# Altium PCB DE-160724.PcbDoc
Units mil, origin at the board's own origin, x right, y up, seen from the top; angles counter-clockwise.
Board outline 3346.46 x 2952.76 mil, 2 copper layers (Top Layer, Bottom Layer); 101 components, 67 nets, 255 pads, 38 vias.
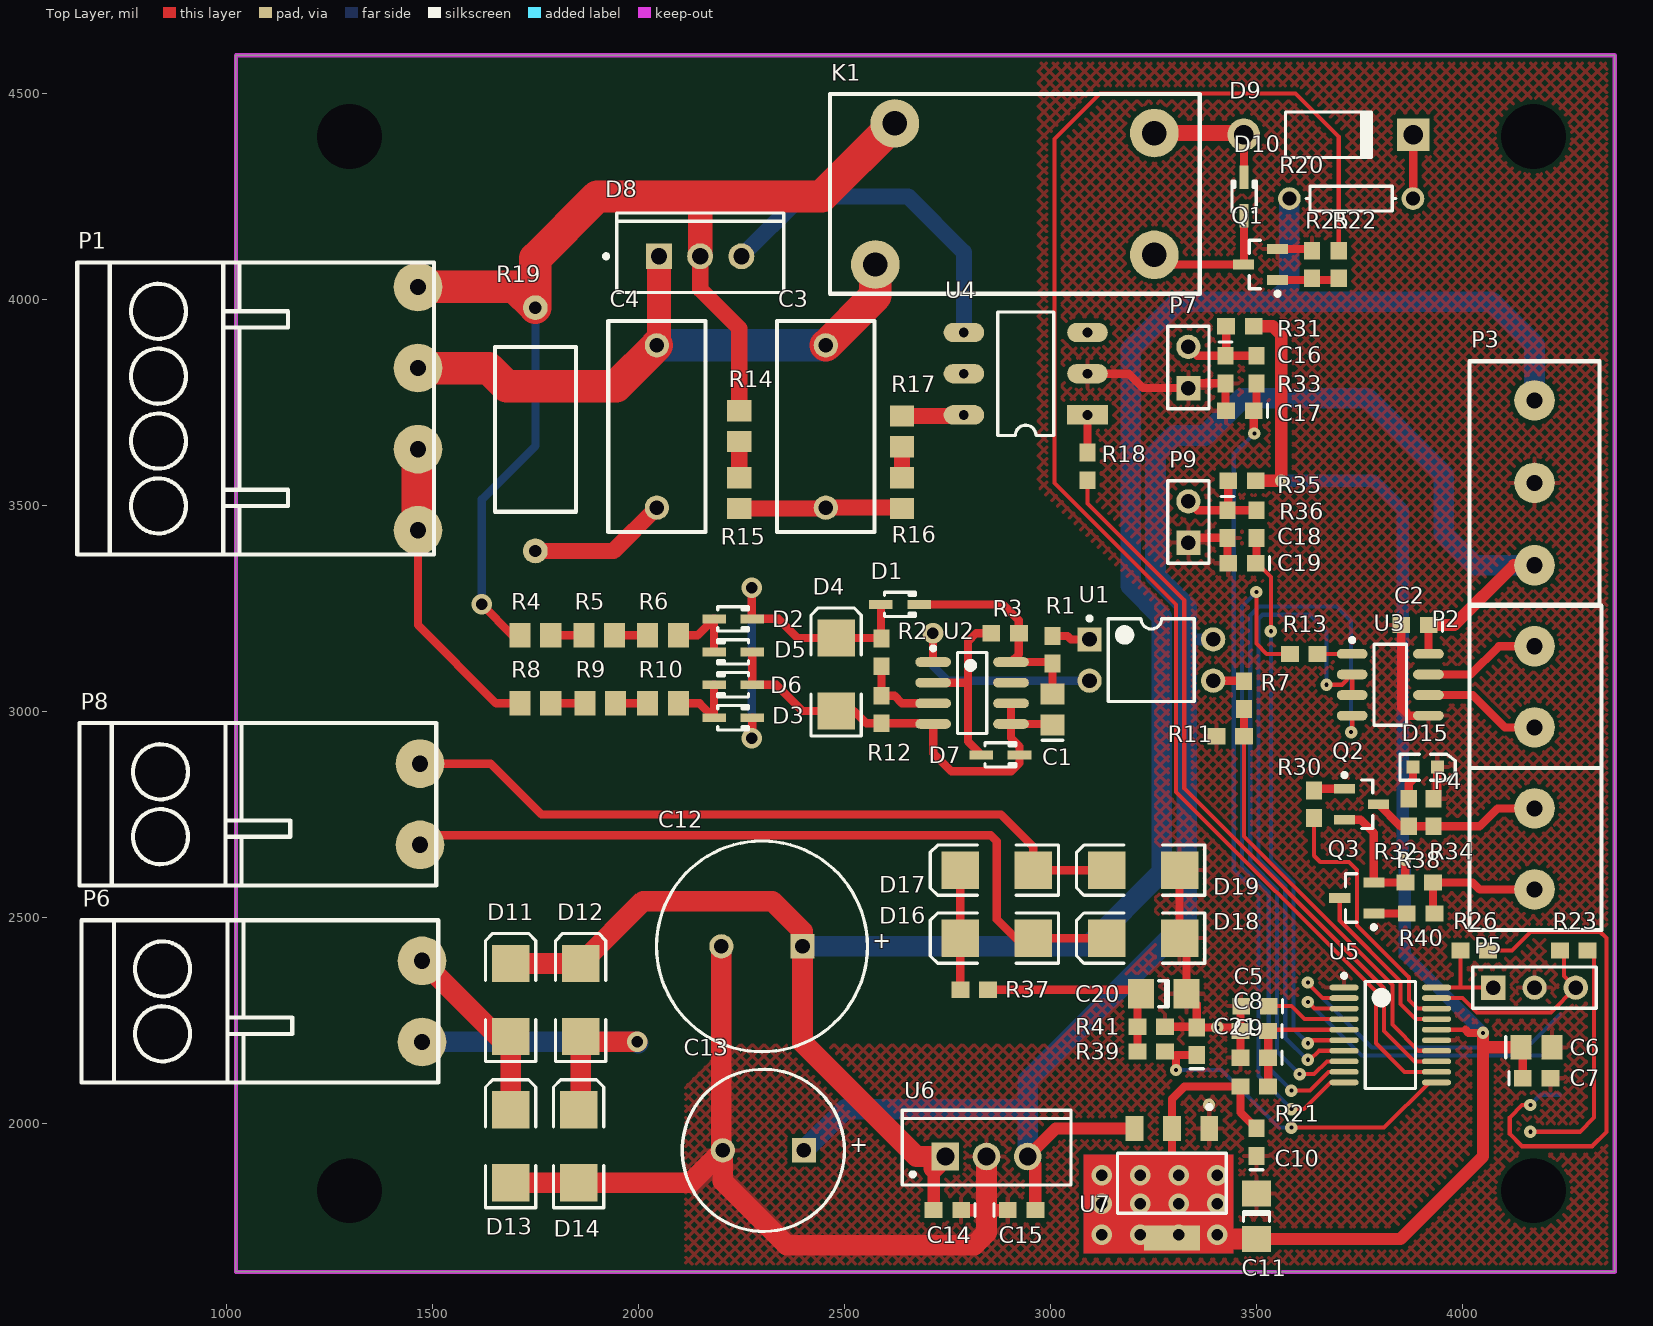
[diagram p0: Top Layer view]
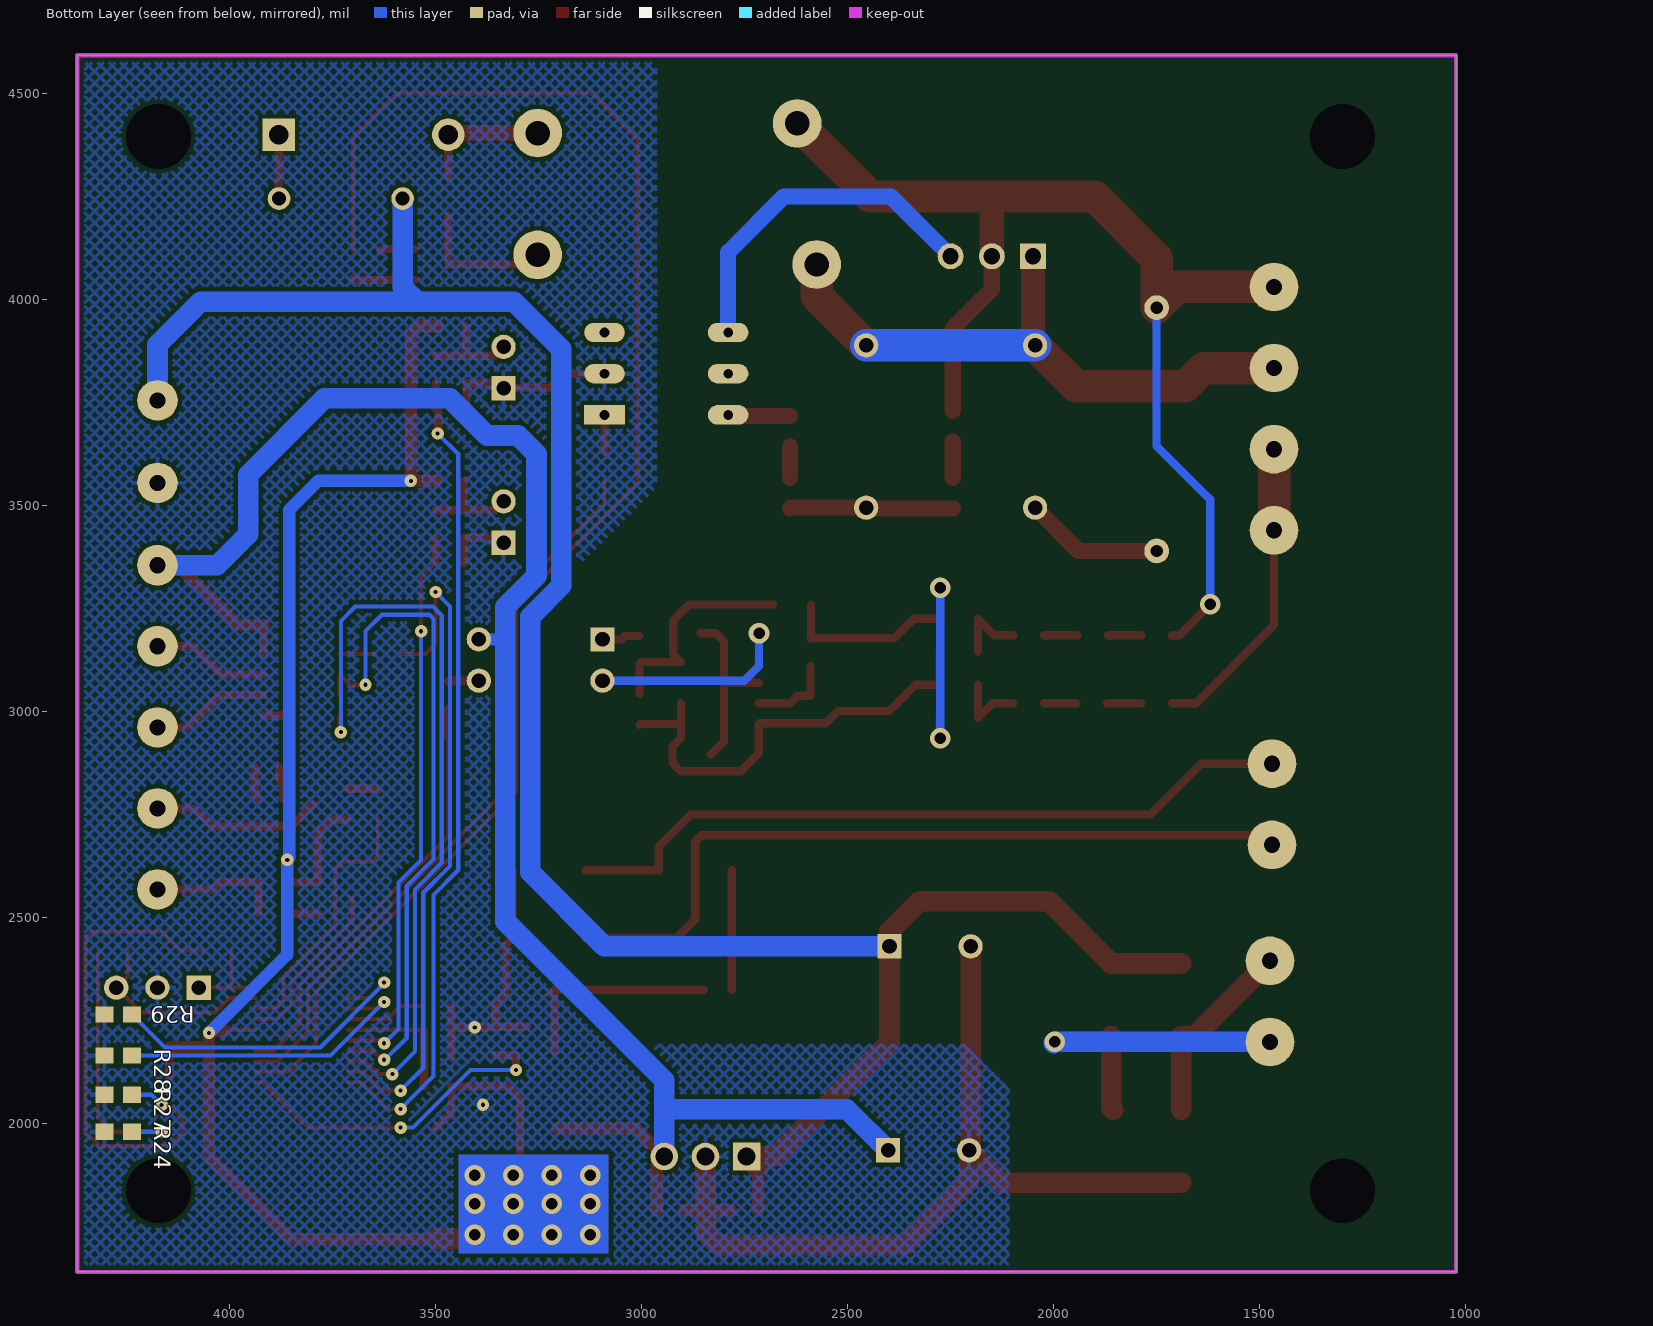
[diagram p1: Bottom Layer view, seen from below]

## Layer stack, top to bottom
Top Solder: solder mask 0.4, Solder Resist, Dk 3.5
Top Layer: signal copper 1.4
Dielectric 1: dielectric 12.6, FR-4, Dk 4.8
Bottom Layer: signal copper 1.4
Bottom Solder: solder mask 0.4, Solder Resist, Dk 3.5

## Board outline
1023.15,1640 1023.15,4592.76 4369.61,4592.76 4369.61,1640

## Design rules (kind name [scope] priority, off if disabled: settings)
Clearance [All] p1: gap=10 ignorepadtopadclearanceinfootprint=FALSE except(0: Arc-Hole Track-Hole SMDPad-Hole THPad-Hole Via-Hole Fill-Hole Poly-Hole Region-Hole Text-Hole)
PolygonConnect [All] p1: connectstyle=Relief reliefconductorwidth=10 reliefentries=4 polygonreliefangle="90 Angle" airgapwidth=10
RoutingVias [All] p1: holewidth=28 width=50 viastyle="Through Hole" minholewidth=28 minwidth=50 maxholewidth=28 maxwidth=50
SolderMaskExpansion [All] p1: expansion=4
Width [All] p1: maxlimit=100 minlimit=10 preferedwidth=20
30 further rules are at their usual default settings.

## Components (designator, comment, footprint, x,y, rotation, side; value= is the part's Value field where it differs from the comment)
C1 "10uF" 0805 3005,3005 r90 top
C2 "100nF" 0603 3885,3210 r180 top
C3 "47nF" "X2 CAP" 2455,3691.85 r270 top
C4 "47nF" "X2 CAP" 2045,3691.85 r270 top
C5 "100nF" 0603 3496.54,2285 r180 top
C6 "4u7" 0805 4180,2185 r0 top
C7 "100nF" 0603 4180,2110 r0 top
C8 "1uF" 0603 3495,2225 r180 top
C9 "10nF" 0603 3495,2160 r180 top
C10 "100nF" 0603 3500,1955 r90 top
C11 "C1206" 1206 3500,1775 r270 top value=47uF
C12 "4700uF" CAPPR5-13X25 2300,2430 r180 top
C13 "470uF" CAPPR5-10X16 2303.43,1935 r180 top
C14 "100nF" 0603 2750,1790 r180 top
C15 "100nF" 0603 2930,1790 r0 top
C16 "1uF" 0603 3425,3830 r270 top
C17 "1uF" 0603 3460,3730 r180 top
C18 "1uF" 0603 3430,3455 r270 top
C19 "1uF" 0603 3465,3360 r180 top
C20 "C1206" 1206 3275,2315 r180 top value=47uF
C21 "1uF" 0603 3355,2200 r90 top
D1 "1N4148" SOD323 2635,3260 r0 top
D2 "1N4148" SOD323 2230,3225 r0 top
D3 "1N4148" SOD323 2230,2985 r0 top
D4 "ZD12V" SMB 2480,3090 r90 top
D5 "1N4148" SOD323 2230,3145 r180 top
D6 "1N4148" SOD323 2230,3065 r180 top
D7 "1N4148" SOD323 2878.74,2895 r0 top
D8 "BTA16-600" ONSC-TO-220-3-221A-07 2150,4105 r90 top
D9 "ZD8V2" DO-41 3675,4400 r0 top
D10 "1N4148" SOD323 3470,4250 r90 top
D11 "S3GB" SMB 1690,2300 r90 top
D12 "S3GB" SMB 1860,2300 r90 top
D13 "S3GB" SMB 1690,1945 r90 top
D14 "S3GB" SMB 1855,1945 r90 top
D15 "STATUS_LED" 1.6X0.8X0.8 3909.53,2865 r0 top
D16 "1N4001" SMB 2870,2450 r180 top
D17 "1N4001" SMB 2870,2615 r180 top
D18 "1N4001" SMB 3225,2450 r180 top
D19 "1N4001" SMB 3225,2615 r180 top
K1 "HF25F" HF25F 2913.58,4256.26 r180 top
P1 "KONEKTOR 4 PINA" "KONEKTOR 4 PINA" 1465,3735.28 r0 top
P2 "RS485" "TERMINAL BLOK 2" 4175,3060 r0 top
P3 "POWER" "TERMINAL BLOK 3" 4175,3555 r180 top
P4 "CTRL" "TERMINAL BLOK 2" 4175,2666.57 r0 top
P5 "ICSP" HDR1X3 4075,2330 r0 top
P6 "PWR_TRAFO" "KONEKTOR 2 PINA" 1475,2296.57 r0 top
P7 "NTC10K" HDR1X2 3335,3785 r90 top
P8 "HEAT_TRAFO" "KONEKTOR 2 PINA" 1470,2775 r0 top
P9 "NTC10K" HDR1X2 3335,3410 r90 top
Q1 "MMBT2222A" SOT23_N 3510,4085 r180 top
Q2 "BC807" SOT23_N 3755,2775 r0 top
Q3 "BC807" SOT23_N 3743.66,2547.4 r180 top
R1 "1K" ERA-0603 3005,3150 r270 top
R2 "3K9" ERA-0603 2590,3143.46 r90 top
R3 "39K" ERA-0603 2890,3190 r0 top
R4 "18K" ERA-0805 1750,3185 r0 top
R5 "18K" ERA-0805 1905,3185 r0 top
R6 "18K" ERA-0805 2060,3185 r0 top
R7 "1K2" ERA-0603 3470,3040 r90 top
R8 "18K" ERA-0805 1750,3020 r0 top
R9 "18K" ERA-0805 1907.4,3020 r0 top
R10 "18K" ERA-0805 2060,3020 r0 top
R11 "2K2" ERA-0603 3436.54,2940 r0 top
R12 "39K" ERA-0603 2590,3005 r90 top
R13 "1K" ERA-0603 3615,3140 r0 top
R14 "220R" ERA-0805 2245,3692.6 r270 top
R15 "220R" ERA-0805 2245,3530 r270 top
R16 "220R" ERA-0805 2640,3530 r90 top
R17 "220R" ERA-0805 2640,3680 r90 top
R18 "180R" ERA-0603 3090,3595 r90 top
R19 "100R" 1W100R 1750,3685 r90 top
R20 "Res1" AXIAL-0.3 3730,4245 r180 top value=47R
R21 "10R" ERA-0603 3495,2090 r180 top
R22 "1K" ERA-0603 3700,4085 r270 top
R23 "10K" ERA-0603 4270,2420 r180 top
R24 "NF" ERA-0603 4270,1980 r180 bottom
R25 "100K" ERA-0603 3635,4085 r270 top
R26 "10K" ERA-0603 4028.46,2420 r180 top
R27 "NF" ERA-0603 4270,2070 r180 bottom
R28 "NF" ERA-0603 4270,2165 r180 bottom
R29 "NF" ERA-0603 4270,2265 r180 bottom
R30 "4K7" ERA-0603 3640,2775 r270 top
R31 "10K" ERA-0603 3460,3935 r0 top
R32 "1K" ERA-0603 3870,2755 r90 top
R33 "1K" ERA-0603 3500,3830 r90 top
R34 "4K7" ERA-0603 3930,2755 r90 top
R35 "10K" ERA-0603 3465,3560 r0 top
R36 "1K" ERA-0603 3500,3455 r90 top
R37 "33K" ERA-0603 2815,2325 r180 top
R38 "4K7" ERA-0603 3895,2585 r0 top
R39 "1K" ERA-0603 3245,2175 r180 top
R40 "4K7" ERA-0603 3898.46,2510 r0 top
R41 "3K3" ERA-0603 3245,2235 r180 top
U1 "PC817" DIP-4 3245,3125 r0 top
U2 "LM393MX" M08A_N 2810,3045 r0 top
U3 "MAX485" D008_L 3825,3065 r0 top
U4 "MOC3052" DIP6 3090,3720 r180 top
U5 "STM32F030F4P6" STM-TSSOP20_N 3825,2215 r0 top
U6 "L78M05CV" TO220 2845,1920 r0 top
U7 "REG1117-3.3" ZZ311 3295,1855 r180 top

## Footprints (in the part's own frame and the unit in brackets; to place one, negate y for a bottom-side part, rotate by r counter-clockwise, add the part's x,y. Pads: shape width x height; smd on the part's side, far side on the other; paste and mask are expansions set on the pad)
1.6X0.8X0.8 [mm] "SM LED; 2 Flat Leads"
  rect 0.8x0.8 smd: 1(-0.75,0) 2(0.75,0)
  silkscreen extent -1.55,-0.8 1.85,0.8
1W100R [mil] "1W 100R resistor"
  round 60 hole 30: 1(-295.28,0) 2(295.28,0)
  silkscreen extent -200,-98 200,98
0603 [mm] "Chip Capacitor; Body 1.6 x 0.8 mm (LxW typ)"
  rect 1.1x1 smd: 1(-0.85,0) 2(0.85,0)
  silkscreen extent -1.7,-0.4 -1.7,0.4
0805 [mm] "Chip Capacitor; Body 2.0 x 1.2 mm (LxW typ)"
  rect 1.3x1.5 smd: 1(-0.95,0) 2(0.95,0)
  silkscreen extent -1.9,-0.65 -1.9,0.65
1206 [mm] "Chip Capacitor; Body 3.2 x 1.6 mm (LxW typ)"
  rect 1.6x1.8 smd: 1(-1.4,0) 2(1.4,0)
  silkscreen extent -0.3,-0.8 0.3,0.8
AXIAL-0.3 [mm] "Axial Device, Thru-Hole; 2 Leads; 0.3 in Pin Spacing"
  round 1.4 hole 0.85: 1(-3.81,0) 2(3.81,0)
  silkscreen extent -2.77,-0.76 2.77,0.76
CAPPR5-10X16 [mm] "Capacitor, Electrolytic, Radial; Body 10 x 16 mm (Dia.xH typ); Pin Spacing 5 mm (typ)"
  rect 1.5x1.5 hole 0.9: 1(-2.5,0)
  round 1.5 hole 0.9: 2(2.5,0)
  silkscreen extent -5,-5 5,5
CAPPR5-13X25 [mm] "Capacitor, Electrolytic, Radial; Body 13 x 25 mm (Dia.xH typ); Pin Spacing 5 mm (typ)"
  rect 1.5x1.5 hole 0.9: 1(-2.5,0)
  round 1.5 hole 0.9: 2(2.5,0)
  silkscreen extent -6.5,-6.5 6.5,6.5
D008_L [mm] "SOIC, 8-Leads, Body 4.9x3.9mm, Pitch 1.27mm, IPC High Density"
  oval 1.9x0.6 smd: 1(-2.35,1.905) 2(-2.35,0.635) 3(-2.35,-0.635) 4(-2.35,-1.905) 5(2.35,-1.905) 6(2.35,-0.635) 7(2.35,0.635) 8(2.35,1.905)
  silkscreen extent -2.47,-2.5 1,2.88, body extent -2,-2.5 2,2.5, height 1.75
DIP6 [mm]
  rect 2.5x1.2 hole 0.6: 1(0,0)
  oval 2.5x1.2 hole 0.6: 2(0,-2.54) 3(0,-5.08) 4(7.62,-5.08) 5(7.62,-2.54) 6(7.62,0)
  silkscreen extent 2.08,-6.35 5.54,1.27, body extent 0.63,-6.48 6.99,1.27, height 1
DIP-4 [mm] "DIP; 4 Leads; Row Spacing 7.62 mm; Pitch 2.54 mm"
  rect 1.5x1.5 hole 0.9: 1(-3.81,1.27)
  round 1.5 hole 0.9: 2(-3.81,-1.27) 3(3.81,-1.27) 4(3.81,1.27)
  silkscreen extent -3.93,-2.55 2.65,2.69, body extent -3.15,-2.5 3.15,2.5, height 5.6
DO-41 [mm] "Diode, Axial; Body 5.2 x 2.7 mm (LxDia. max), Lead Dia. 0.86 mm (max)"
  round 2 hole 1.2: 1(-5.23,0)
  rect 2x2 hole 1.2: 2(5.23,0)
  silkscreen extent -2.65,-1.4 2.75,1.4
ERA-0603 [mm] "Chip Resistor; Body 1.6 x 0.8 mm (LxW typ)"
  rect 1.1x1 smd: 1(-0.85,0) 2(0.85,0)
ERA-0805 [mm] "Chip Resistor; Body 2 x 1.3 mm (LxW typ)"
  rect 1.3x1.5 smd: 1(-0.95,0) 2(0.95,0)
HDR1X2 [mm] "Connector; Header; 2 Position"
  rect 1.5x1.5 hole 0.9: 1(0,0)
  round 1.5 hole 0.9: 2(2.54,0)
  silkscreen extent -1.27,-1.27 3.81,1.27
HDR1X3 [mm] "Connector; Header; 3 Position"
  rect 1.5x1.5 hole 0.9: 1(0,0)
  round 1.5 hole 0.9: 2(2.54,0) 3(5.08,0)
  silkscreen extent -1.27,-1.27 6.35,1.27
HF25F [mm] "PCB relay 20A/250VAC 16A/30VDC"
  round 3 hole 1.5: 1(-8.6,3.75) 2(-8.6,-3.75) 3(8.6,4.35) 4(7.4,-4.35)
  silkscreen extent -11.4,-6.15 11.4,6.15, body extent -11.43,-6.1 11.43,6.1, height 25
"KONEKTOR 2 PINA" [mm] "Razdvojivi konektor 2 pina"
  round 3 hole 1: 1(0,2.5) 2(0,-2.5)
  silkscreen extent -21,-5 1,5, body extent -20.95,-5.08 1.02,5.08, height 10
"KONEKTOR 4 PINA" [mm] "Razdvojivi konektor 4 pina"
  round 3 hole 1: 1(0,7.5) 2(0,2.5) 3(0,-2.5) 4(0,-7.5)
  silkscreen extent -21,-9 1,9, body extent -20.95,-9.02 1.02,9.14, height 10
M08A_N [mm] "SOIC, 8-Leads, Body 4.9x3.9mm, Pitch 1.27mm, IPC Medium Density"
  oval 2.2x0.6 smd: 1(-2.4,1.905) 2(-2.4,0.635) 3(-2.4,-0.635) 4(-2.4,-1.905) 5(2.4,-1.905) 6(2.4,-0.635) 7(2.4,0.635) 8(2.4,1.905)
  silkscreen extent -2.52,-2.5 0.9,2.88, body extent -2,-2.5 2,2.5, height 1.75
ONSC-TO-220-3-221A-07 [mm] "FM, 3-Leads, Body 10.3x4.85mm, Pitch 2.54mm"
  rect 1.6x1.6 hole 1: 1(0,2.54)
  round 1.6 hole 1: 2(0,0) 3(0,-2.54)
  silkscreen extent -2.23,-5.15 2.67,5.92, body extent -2.21,-5.15 2.64,5.15, height 19.68
SMB [mm] "DO-214-AA/SMB; 2 C-Bend Leads; Body 5.3 x 3.6 mm, inc. leads (LxW)"
  rect 2.3x2.3 smd: 1(-2.25,0) 2(2.25,0)
  silkscreen extent -3.8,-1.55 4.1,1.55
SOD323 [mm] "SOD-323/SC-76; 2 Leads; Body 1.7 x 1.3 mm, (LxW)"
  rect 1.45x0.55 smd: 1(1.175,0) 2(-1.175,0)
  silkscreen extent -0.95,-0.75 0.95,0.75
SOT23_N [mm] "SOT23, 3-Leads, Body 2.9x1.3mm, Pitch 0.95mm, Lead Span 2.3mm, IPC Medium Density"
  rect 1.3x0.6 smd: 1(-1.05,0.95) 2(-1.05,-0.95) 3(1.05,0)
  silkscreen extent -1.18,-1.5 0.7,1.92, body extent -0.7,-1.5 0.7,1.5, height 1.1
STM-TSSOP20_N [mm] "SOP, 20-Leads, Body 6.6x4.5mm, Pitch 0.65mm, IPC Medium Density"
  oval 1.8x0.35 smd: 1(-2.85,2.925) 2(-2.85,2.275) 3(-2.85,1.625) 4(-2.85,0.975) 5(-2.85,0.325) 6(-2.85,-0.325) 7(-2.85,-0.975) 8(-2.85,-1.625) 9(-2.85,-2.275) 10(-2.85,-2.925) 11(2.85,-2.925) 12(2.85,-2.275) 13(2.85,-1.625) 14(2.85,-0.975) 15(2.85,-0.325) 16(2.85,0.325) 17(2.85,0.975) 18(2.85,1.625) 19(2.85,2.275) 20(2.85,2.925)
  silkscreen extent -2.97,-3.3 1.55,3.77, body extent -2.25,-3.3 2.25,3.3, height 1.2
"TERMINAL BLOK 2" [mm] "Terminal blok 3,5mm"
  round 2.5 hole 1: 1(0,-2.5) 2(0,2.5)
  silkscreen extent -4,-5 4.13,5
"TERMINAL BLOK 3" [mm] "Terminal blok konektor 3 pina"
  round 2.5 hole 1: 1(0,5.08) 2(0,0) 3(0,-5.08)
  silkscreen extent -4,-7.5 4,7.5
TO220 [mm] "TO, Thru-Hole, Vertical, Heatsink Mounted; 3 In-Line Leads; Pitch 2.54 mm"
  rect 1.7x1.7 hole 1.1: 1(-2.54,0)
  round 1.7 hole 1.1: 2(0,0) 3(2.54,0)
  silkscreen extent -5.2,-1.75 5.2,2.85, body extent -5.25,-1.8 5.25,2.9, height 19.7
"X2 CAP" [mm] "X2 275VAC CAPACITOR"
  round 1.5 hole 0.9: 1(-5,0) 2(5,0)
  silkscreen extent -6.5,-3 6.5,3, body extent -6.35,-3.05 6.35,3.05, height 10
ZZ311 [mm] "SOT-223/SC-73; 4 Leads; Body 6.7 x 7.3 mm, inc. leads (LxW max)"
  rect 1.1x1.55 smd: 1(-2.3,-3.375) 2(0,-3.375) 3(2.3,-3.375)
  rect 3.45x1.55 smd: 4(0,3.375)
  silkscreen extent -3.35,-4.82 3.35,1.85

## Part data
C1 C6: library part C0805, "Ceramic Chip Capacitor - Standard", PackageDocument=Mar-2001, Code_IPC=2012[0805], Code_JEITA=0805, ComponentLink1Description="Manufacturer Link", ComponentLink1URL=http://www.kemet.com/, ComponentLink2Description=Datasheet, ComponentLink2URL=http://www.kemet.com/kemet/web/homepage/kechome.nsf/vapubfilesname/F3102TA.pdf/$file/F3102TA.pdf, DatasheetDocument=Mar-2001, LatestRevisionDate=19-Mar-2004, LatestRevisionNote="Silkscreen size reduced.", Note="Footprint corresponds to dimensions for bulk cassette packaging. This case size has tightened tolerances.", PackageReference=0805, Published=17-Jul-2002, Publisher="Altium Limited"
C2 C5 C7 C8 C9 C10 C14 C15 C16 C17 C18 C19 C21: library part C0603, "Ceramic Chip Capacitor - Standard", PackageDocument=Mar-2001, Code_IPC="1608 [0603]", Code_JEITA=0603, ComponentLink1Description="Manufacturer Link", ComponentLink1URL=http://www.kemet.com/, ComponentLink2Description=Datasheet, ComponentLink2URL=http://www.kemet.com/kemet/web/homepage/kechome.nsf/vapubfilesname/F3102TA.pdf/$file/F3102TA.pdf, DatasheetDocument=Mar-2001, LatestRevisionDate=19-Mar-2004, LatestRevisionNote="Silkscreen size reduced.", Note="Footprint corresponds to dimensions for bulk cassette packaging. This case size has tightened tolerances.", PackageReference=0603, Published=17-Jul-2002, Publisher="Altium Limited"
C3 C4: library part "CAP X2", "X2 275VAC capaitor"
C11 C20: "Ceramic Chip Capacitor - Standard", PackageDocument=Mar-2001, Code_IPC="3216 [1206]", Code_JEITA=1206, ComponentLink1Description="Manufacturer Link", ComponentLink1URL=http://www.kemet.com/, ComponentLink2Description=Datasheet, ComponentLink2URL=http://www.kemet.com/kemet/web/homepage/kechome.nsf/vapubfilesname/F3102TA.pdf/$file/F3102TA.pdf, DatasheetDocument=Mar-2001, LatestRevisionDate=19-Mar-2004, LatestRevisionNote="Silkscreen size reduced.", PackageReference=1206, Published=17-Jul-2002, Publisher="Altium Limited"
C12: library part EKA00GG447C00, "Aluminum Electrolytic Capacitor, Radial Style with Long Leads: 4700uF, 10V", ComponentLink1Description="Manufacturer Link", ComponentLink1URL=http://www.vishay.com/, ComponentLink2Description=Datasheet, ComponentLink2URL=http://www.vishay.com/docs/25014/eka.pdf, DatasheetDocument=20-Feb-2001, DrillSize="Nominal, Rounded To The Nearest 0.1mm", Note="Refer to Manufacturer's Data Sheets for other lead formations", PackageReference=CAPPR5-13X25, Published=19-Mar-2004, Publisher="Altium Limited"
C13: library part EKA00DD347F00, "Aluminum Electrolytic Capacitor, Radial Style with Long Leads: 470uF, 35V", ComponentLink1Description="Manufacturer Link", ComponentLink1URL=http://www.vishay.com/, ComponentLink2Description=Datasheet, ComponentLink2URL=http://www.vishay.com/docs/25014/eka.pdf, DatasheetDocument=20-Feb-2001, DrillSize="Nominal, Rounded To The Nearest 0.1mm", Note="Refer to Manufacturer's Data Sheets for other lead formations", PackageReference=CAPPR5-10X16, Published=19-Mar-2004, Publisher="Altium Limited"
D1 D2 D3 D5 D6 D7 D10: library part 1PS76SB10, "Schottky Barrier Diode", ComponentLink1Description="Manufacturer Link", ComponentLink1URL=http://www.semiconductors.philips.com/, ComponentLink2Description=Datasheet, ComponentLink2URL=http://www.semiconductors.philips.com/acrobat/datasheets/1PS76SB10_2.pdf, DatasheetVersion=14-Oct-1996, LatestRevisionDate=19-Mar-2004, LatestRevisionNote="Silkscreen size reduced.", PackageDescription="SOD-323/SC-76; 2 Leads; Body 1.7 x 1.3 mm, (LxW)", PackageReference=SOD323, PackageVersion=May-1999, Published=17-Sep-2003, Publisher="Altium Limited"
D4: library part 10BQ100, "Schottky Rectifier", ComponentLink1Description="Manufacturer Link", ComponentLink1URL=http://www.irf.com/, ComponentLink2Description=Datasheet, ComponentLink2URL=http://www.irf.com/product-info/datasheets/data/10bq100.pdf, DatasheetVersion=PD-2.437A, LatestRevisionDate=17-Jul-2002, LatestRevisionNote="Re-released for DXP Platform.", PackageDescription="DO-214-AA/SMB; 2 C-Bend Leads; Body 5.3 x 3.6 mm, inc. leads (LxW)", PackageReference=SMB, Published=8-Jun-2000, Publisher="Altium Limited"
D8: library part BTA08-600BW3G, "Triacs, Silicon Bidirectional Thyristor, 3-Pin TO-220, Pb-Free, Tube", Manufacturer="On Semiconductor", Supplier Part Number 1=BTA08-600BW3G-ND, ComponentLink1Description="Manufacturer URL", ComponentLink1URL=http://www.onsemi.com/, ComponentLink2Description=Datasheet, ComponentLink2URL=http://www.onsemi.com/pub_link/Collateral/BTA08-600BW3-D.PDF, ComponentLink3Description="Package Specification", ComponentLink3URL=http://www.onsemi.com/pub_link/Collateral/221A-07.PDF, DatasheetVersion="Rev. 1", IGT Max (mA)=50, IT(RMS) Max (A)=8, ITSM Max (A)=90, Mounting Technology="Through Hole", PackageDescription="3-Pin Flange Mount, Vertical Straight Lead, Body 9.97 x 4.445 mm, Pitch 2.54 mm", PackageReference=TO-220-3-221A-07, PackageVersion="Rev. O, 07/2008", Packing=Tube, PartNumber=BTA08-600BW3G, RoHS=Pb-Free, Supplier 1=Digi-Key, Supplier 2=Newark, Supplier 3=Mouser, Supplier Part Number 2=13P2072, Supplier Part Number 3=863-BTA08-600BW3G
D9: library part 1N4003, "1.0 Ampere General Purpose Rectifier", PackageDocument=Aug-1999, Code_JEDEC=DO-204-AL, ComponentLink1Description="Manufacturer Link", ComponentLink1URL=http://www.fairchildsemi.com/, ComponentLink2Description="Pinout Specification", ComponentLink2URL=http://www.fairchildsemi.com/ds/1N%2F1N4001.pdf, DatasheetDocument=1998, LatestRevisionDate=17-Jul-2002, LatestRevisionNote="Re-released for DXP Platform.", PackageReference=DO-41, Published=8-Jun-2000, Publisher="Altium Limited"
D11 D12 D13 D14 D16 D17 D18 D19: library part "D Schottky", "Schottky Diode", Code_JEDEC=DO-214-AA, LatestRevisionDate=17-Jul-2002, LatestRevisionNote="Re-released for DXP Platform.", PackageDescription="DO-214-AA/SMB; 2 C-Bend Leads; Body 5.3 x 3.6 mm, inc. leads (LxW)", PackageReference=SMB, Published=8-Jun-2000, Publisher="Altium Limited"
D15: library part HSMB-C190, "Blue Surface Mount Chip LED, Blue", LED_Colour=Blue, ComponentLink1Description="Manufacturer Link", ComponentLink1URL=http://www.avagotech.com/, ComponentLink2Description=Datasheet, ComponentLink2URL=http://cp.literature.agilent.com/litweb/pdf/5988-5211EN.pdf, DatasheetVersion=26-Feb-2002, LuminousIntensity="1.6mcd (Minimum).", PackageDescription="SM LED; 2 Flat Leads", PackageReference=1.6X0.8X0.8, PackageVersion=Mar-2002, PCB_Layout="Complies with manufacturer's recommendation.", Published=11-Dec-2002, Publisher="Altium Limited"
K1: "PCB relay 250VAC/20A 30VDC/16A"
P1: "Razdvojivi konektor 4 pina"
P2 P4: library part "TERMINAL BLOK 2", "Terminal blok konektor 3,5 mm"
P3: library part "TERMINAL BLOK 3", "3 pinski terminal blok konektor"
P5: library part "Header 3", "Header, 3-Pin", LatestRevisionDate=17-Jul-2002, LatestRevisionNote="Re-released for DXP Platform.", Publisher="Altium Limited"
P6 P8: library part "KONEKTOR 2 PINA", "Razdvojivi konetor 2 pina"
P7 P9: library part "Header 2", "Header, 2-Pin", LatestRevisionDate=17-Jul-2002, LatestRevisionNote="Re-released for DXP Platform.", Publisher="Altium Limited"
Q1: library part BC817, "NPN General-purpose Transistor", ComponentLink1Description="Manufacturer Link", ComponentLink1URL=http://www.semiconductors.philips.com/, ComponentLink2Description=Datasheet, ComponentLink2URL=http://www.semiconductors.philips.com/acrobat/datasheets/BC817_BC817W_BC337_5.pdf, DatasheetVersion=Jun-1999, LatestRevisionDate=12-Dec-2006, LatestRevisionNote="IPC-7351 Footprint Added.", PackageDescription="3-Pin SOT-23 Package 0.95 mm Pitch, 2.3 mm Lead Span", PackageReference=SOT23, PackageVersion=May-1999, Published=17-Sep-2003, Publisher="Altium Limited"
Q2 Q3: "PNP General-purpose Transistor", ComponentLink1Description="Manufacturer Link", ComponentLink1URL=http://www.semiconductors.philips.com/, ComponentLink2Description=Datasheet, ComponentLink2URL=http://www.semiconductors.philips.com/acrobat/datasheets/BC807_BC807W_BC327_5.pdf, DatasheetVersion=8-Apr-1999, LatestRevisionDate=12-Dec-2006, LatestRevisionNote="IPC-7351 Footprint Added.", PackageDescription="3-Pin SOT-23 Package 0.95 mm Pitch, 2.3 mm Lead Span", PackageReference=SOT23, PackageVersion=May-1999, Published=17-Sep-2003, Publisher="Altium Limited"
R1 R2 R3 R7 R11 R12 R18 R22 R25 R31 R33 R35 R36 R37 R39 R41: library part ERAV, "Metal Film Thermosensitive Chip Resistor, 0.56 Ohm to 10k Ohm Range, 5% Tolerance, 0603 Size, 0.063 W", PackageDocument=Mar-2003, Code_IPC="1608 [0603]", ComponentLink1Description="Manufacturer Link", ComponentLink1URL=http://www.panasonic.com/industrial/components/resistive_products.htm, ComponentLink2Description=Datasheet, ComponentLink2URL=http://www.panasonic.com/industrial/components/pdf/AOF0000CE1.pdf, LatestRevisionDate=19-Mar-2004, LatestRevisionNote="Silkscreen size reduced.", Note="If flow soldering, adjust pad width of PCB Footprint to 0.7 - 0.8 times the width of the resistor.", PackageReference=ERA-0603, Published=17-Dec-2003, Publisher="Altium Limited"
R4 R5 R6 R8 R9 R10 R14 R15 R16 R17: library part ERAS, "Metal Film Thermosensitive Chip Resistor, 0.56 Ohm to 10k Ohm Range, 5% Tolerance, 0805 Size, 0.1 W", PackageDocument=Mar-2003, Code_IPC="2012 [0805]", ComponentLink1Description="Manufacturer Link", ComponentLink1URL=http://www.panasonic.com/industrial/components/resistive_products.htm, ComponentLink2Description=Datasheet, ComponentLink2URL=http://www.panasonic.com/industrial/components/pdf/AOF0000CE1.pdf, LatestRevisionDate=19-Mar-2004, LatestRevisionNote="Silkscreen size reduced.", Note="If flow soldering, adjust pad width of PCB Footprint to 0.7 - 0.8 times the width of the resistor.", PackageReference=ERA-0805, Published=17-Dec-2003, Publisher="Altium Limited"
R13 R21 R23 R24 R26 R27 R28 R29 R30 R32 R34 R38 R40: library part ERA6Y, "Rectangular Thick Film Chip Resistor, 10 Ohm to 1M Ohm Range, 0.1% and 0.5% Tolerance, 0805 Size, 0.1 W", PackageDocument=Mar-2003, Code_IPC="2012 [0805]", ComponentLink1Description="Manufacturer Link", ComponentLink1URL=http://www.panasonic.com/industrial/components/resistive_products.htm, ComponentLink2Description=Datasheet, ComponentLink2URL=http://www.panasonic.com/industrial/components/pdf/AOA0000CE8.pdf, LatestRevisionDate=19-Mar-2004, LatestRevisionNote="Silkscreen size reduced.", Note="If flow soldering, adjust pad width of PCB Footprint to 0.7 - 0.8 times the width of the resistor.", PackageReference=ERA-0805, Published=17-Dec-2003, Publisher="Altium Limited"
R19: library part 1W100R, "Carbon F 1W resistor", ComponentLink1Description="Manufacturer Link", ComponentLink1URL=http://www.panasonic.com/industrial/components/resistive_products.htm, ComponentLink2Description=Datasheet, ComponentLink2URL=http://www.panasonic.com/industrial/components/pdf/AOA0000CE12.pdf, PackageReference=RD6.35x2.3, Published=17-Dec-2003, Publisher="Altium Limited"
R20: "Resistor", LatestRevisionDate=17-Jul-2002, LatestRevisionNote="Re-released for DXP Platform.", PackageDescription="Axial Device, Thru-Hole; 2 Leads; 0.3 in Pin Spacing", PackageReference=AXIAL-0.3, Published=8-Jun-2000, Publisher="Altium Limited"
U1: "4-Pin Phototransistor Optocoupler", DatasheetVersion=Nov-2003, LatestRevisionDate=04-Mar-2005, LatestRevisionNote="Sch pins 3 & 4 Swapped.", PackageReference=DIP-4, Published=24-Mar-1999, Publisher="Altium Limited"
U2: "Low Power Low Offset Voltage Dual Comparator, 8-pin Narrow SOIC", Manufacturer="National Semiconductor", PackageTopMarking=NSZXTT*LM*393M, PowerWise=N, Code_IPC=SOIC127P600-8, Code_JEDEC=MS-012-AA, ComponentLink1Description="Manufacturer URL", ComponentLink1URL=http://www.national.com/, ComponentLink2Description="LM393 Datasheet", ComponentLink2URL=http://www.national.com/ds/LM/LM393.pdf, ComponentLink3Description="LM393 Web Page", ComponentLink3URL=http://www.national.com/pf/LM/LM393.html, ComponentLink4Description="M08A Package Page", ComponentLink4URL=http://www.national.com/packaging/folders/m08a.html, CompType=Comparator, DatasheetVersion=Aug-2002, High-Reliability=Y, PackageDescription="SOIC Narrow, 4.9 x 3.9 x 1.45mm, 8 Lead, 1.27mm Pitch", PackageReference=M08A, PackageVersion="revM, May-2009", PartNumber=LM393MX, PinCount=8, RoHS=N
U3: library part SN75176BD, "Differential Bus Transceiver", Code_IPC=SOIC127P600-8, ComponentLink1Description="Manufacturer Link", ComponentLink1URL=http://www.ti.com/, ComponentLink2Description=Datasheet, ComponentLink2URL=http://www-s.ti.com/sc/ds/sn75176b.pdf, DatasheetVersion=Sep-1989, LatestRevisionDate=13-Apr-2006, LatestRevisionNote="IPC-7351 Footprint Added.", Note="Receiver Hysteresis of 50mV Typical", PackageDescription="8-Pin Small Outline Integrated Circuit 1.27 mm Pitch", PackageReference=D008, PackageVersion=Jan-1998, Published=15-May-2002, Publisher="Altium Limited"
U4: library part MOC3081, "Zero-Cross Optoisolator Triac Driver"
U5: "ARM Cortex-M0 32-bit MCU, 16 KB Flash, 4 KB Internal RAM, 15 I/Os, 20-pin TSSOP, -40 to 85 degC, Tube", I/Os (High Current)=15, Operating Frequency(F) (Processor speed) (MHz)=48, Supplier Part Number 1=497-14044-5-ND, Supply Voltage(Vcc) min (V)=2.4, ComponentLink1Description="Manufacturer URL", ComponentLink1URL=http://www.st.com/web/en/home.html, ComponentLink2Description=Datasheet, ComponentLink2URL=http://www.st.com/st-web-ui/static/active/en/resource/technical/document/datasheet/DM00088500.pdf, ComponentLink3Description="Package Specification", ComponentLink3URL=http://www.st.com/st-web-ui/static/active/en/resource/technical/document/datasheet/DM00065136.pdf, Core="ARM Cortex-M0", DatasheetVersion="Rev. 1", FLASH Size (Prog) (kB)=16, Internal RAM Size (kB)=4, Mounting Technology="Surface Mount", PackageDescription="20-Pin Thin Shrink Small Outline Package, 6.5 x 4.4 mm Body, 0.65 mm Pitch", PackageReference=TSSOP20, PackageVersion="Rev. 1, 11/2012", Packing=Tube, PartNumber=STM32F030F4P6, Supplier 1=Digi-Key, Supplier 2=Newark, Supplier 3=Mouser, Supplier Part Number 2=06X3648, Supplier Part Number 3=511-STM32F030F4P6
U6: "Positive Voltage Regulator, 5V, 3-Pin TO-220", ComponentLink1Description="Manufacturer URL", ComponentLink1URL=http://www.st.com, ComponentLink2Description=Datasheet, ComponentLink2URL=http://www.st.com/internet/com/TECHNICAL_RESOURCES/TECHNICAL_LITERATURE/DATASHEET/CD00000447.pdf, ComponentLink3Description="Package Specification", ComponentLink3URL=http://www.st.com/internet/com/TECHNICAL_RESOURCES/TECHNICAL_LITERATURE/PACKAGE_INFORMATION/CD00004649.pdf, DatasheetVersion=Nov-2010, PackageDescription="TO, Thru-Hole, Vertical, Heatsink Mounted; 3 In-Line Leads; Pitch 2.54 mm", PackageReference=TO220, PackageVersion=ver3.0, PartNumber=L78M05CV
U7: "800mA and 1A Low Dropout Positive Regulator 2.85V, 3.3V, 5V, and Adjustable", ComponentLink1Description="Manufacturer Link", ComponentLink1URL=http://www.ti.com/, ComponentLink2Description=Datasheet, ComponentLink2URL=http://www-s.ti.com/sc/ds/REG1117.pdf, DatasheetVersion=Sep-1997, LatestRevisionDate=17-Jul-2002, LatestRevisionNote="Re-released for DXP Platform.", PackageDescription="SOT-223/SC-73; 4 Leads; Body 6.7 x 7.3 mm, inc. leads (LxW max)", PackageReference=ZZ311, PackageVersion=revC, Published=8-Jun-2000, Publisher="Altium Limited"

## Free pads (board coordinates)
  round 60 hole 157.48: 5(1298.74,1836.85) 5(1298.74,4395.91) 5(4172.76,1836.85) 5(4172.76,4395.91)

## Via types
v1: diameter 30, hole 10, Top Layer to Bottom Layer, 21 vias
v2: diameter 50, hole 28, Top Layer to Bottom Layer, 17 vias

## Nets (pads, with @x,y where several pads share a name; then routed paths per layer and width w, separated by ;. In a path a pad name is that pad's centre, name@x,y a point inside that pad or via, vN(x,y) a via of type N, cw(c..) or ccw(c..) an arc to the next point about the centre after c; other vN are vias at no path point)
+3V3: C6.1 C7.1 C10.2 C11.2 Q2.2 Q3.2 R21.2 R31.2 R35.2 R38.1 U5.16 U7.2 U7.4 | length 4576.1
  Top Layer w10: U5.16 4007.2,2227.8
  Top Layer w20: v2@3415.12,1719.88 3297.24,1719.88 U7.4 U7.2 3295,2060 3325,2090 R21.2 3461.54,2026.93 C10.2 ; Q2.2 3752.4,2737.6 3785,2705 Q3.2 3785.2,2585 R38.1 3861.54,2638.46 v1(3860,2640) ; 4007.2,2227.8 4015,2220 v1(4050,2220) ; C6.1 4146.54,2181.06 C7.1
  Top Layer w30: R31.2 3540,3935 3560,3915 v1(3560,3560) R35.2 ; C11.2 3849.88,1719.88 4050,1920 4050,2185 ; v1(4050,2220) 4050,2185 ; C6.1 4050,2185
  Top Layer w50: v2(3405,1730) 3415.12,1719.88 C11.2
  Bottom Layer w30: v1(3560,3560) 3785,3560 3855,3490 3855,2645 v1(3860,2640) 3860,2410 v1(4050,2220)
  other v2: 3125,1730 3218.33,1730 3311.67,1730 3125,1805 3218.33,1805 3311.67,1805 3405,1805 3125,1875 3218.33,1875 3311.67,1875 3405,1875
+5V: C2.1 C13.1 C15.2 P3.1 U1.4 U3.8 U6.3 U7.3 | length 4587.9
  Top Layer w20: U3.8 3917.52,3209.06 C2.1
  Top Layer w30: C15.2 2963.46,1901.54 U6.3 3012.87,1987.87 U7.3 ; C2.1 3980,3210 4125,3355 P3.1
  Bottom Layer w30: 3330.47,3170 3335.47,3175 U1.4
  Bottom Layer w50: C13.1 2501.85,2035 2945,2035 ; U6.3 2945,2035 ; P3.1 4030,3355 3955,3430 3955,3575 3770,3760 3465,3760 3375,3670 3300,3670 3255,3625 3255,3329.85 3330.47,3254.38 3330.47,3170 3330.47,2490.47 2945,2105 2945,2035
+24V: C12.1 C14.2 D11.2 D12.2 P3.3 R20.2 U6.1 | length 5392.7
  Top Layer w30: C14.2 U6.1@2716.54,1891.54
  Top Layer w50: D11.2 D12.2 2011.42,2540 2325,2540 2398.43,2466.57 C12.1 2398.43,2196.57 2675,1920 U6.1 U6.1@2716.54,1891.54
  Bottom Layer w50: C12.1 3090,2430 3270.47,2610.47 3270.47,3229.53 3195,3305 3195,3880 3310,3995 3545,3995 ; R20.2 3580,4030 3545,3995 ; P3.3 4175,3890 4070,3995 3545,3995
AC_L: D8.2 K1.4 P1.1 R4.1 R14.1 R19.2 | length 2890.6
  Top Layer w20: v2(1620,3260) 1695,3185 R4.1
  Top Layer w39.37: D8.2 2150,4025 2245,3930 R14.1
  Top Layer w59.06: D8.2 2150,4250
  Top Layer w78.74: P1.1 1699.72,4030.55 R19.2 1750,4100 1900,4250 2150,4250 2444.72,4250 K1.4
  Bottom Layer w20: v2(1620,3260) 1620,3515 1750,3645 R19.2
AC_N: P1.3 P1.4 R8.1 | length 753.1
  Top Layer w20: P1.4 1465,3210 1655,3020 R8.1
  Top Layer w78.74: P1.4 P1.3
AC_O: C3.1 C4.1 D8.1 K1.3 P1.2 | length 1513.4
  Top Layer w59.06: C4.1 2050,3893.7 D8.1
  Top Layer w78.74: P1.2 1636.3,3833.7 1680,3790 1946.3,3790 C4.1 ; C3.1 2575,4008.7 K1.3
  Bottom Layer w78.74: C4.1 C3.1
ADDRESS_0: R29.2 U5.2 | length 816.3
  Top Layer w10: v1(3625,2342.5) 3625,2340 3660.43,2304.57 U5.2
  Bottom Layer w10: v1(3625,2342.5) 3625,2340 3780,2185 4156.54,2185 R29.2
ADDRESS_1: R28.2 U5.3 | length 759.8
  Top Layer w10: v1(3625,2295) 3641.02,2278.98 U5.3
  Bottom Layer w10: v1(3625,2295) 3755,2165 R28.2
CTRL_IN: Q3.3 U5.17 | length 420.9
  Top Layer w10: Q3.3 3702.32,2492.68 3850,2345 3850,2290 3886.61,2253.39 U5.17
CTRL_IN_: P4.1 R38.2 R40.2 | length 330
  Top Layer w20: R40.2 3928.46,2513.46 R38.2 4025,2585 4041.85,2568.15 P4.1
GND: C2.2 C5.2 C6.2 C7.2 C8.2 C9.2 C10.1 C11.1 C12.2 C13.2 C14.1 C15.1 C16.2 C17.2 C18.2 C19.2 C20.1 C21.2 D13.1 D14.1 D15.2 D18.1 D19.1 P3.2 P5.2 P7.1 P9.1 Q1.2 R11.1 R24.1 R25.1 R27.1 R28.1 R29.1 R34.2 R41.1 U3.5 U4.2 U5.1 U5.15 U6.2 U7.1 | length 3869.4
  Top Layer w20: U4.2 3190,3820 3225,3785 P7.1 3346.54,3796.54 C16.2 3425,3731.54 C17.2 ; R41.1 3353.46,2235 C21.2 ; D19.1 D18.1 3330.12,2433.46 C20.1 3355,2290.12 C21.2 ; P9.1 3346.54,3421.54 C18.2 3430,3361.54 C19.2 ; C9.2 C8.2 ; C5.2 3461.54,2283.46 C8.2 ; Q1.2 3631.06,4122.4 R25.1 ; C2.2 3851.54,3008.46 3870,2990 U3.5 ; R34.2 3939.06,2797.52 D15.2 ; C21.2 v1(3405,2233.46) 3453.07,2233.46 C8.2
  Top Layer w30: C14.1 2845,1790 C15.1
  Top Layer w50: D13.1 D14.1 2126.42,1856.42 C13.2 ; C12.2 2201.57,1938.42 C13.2 ; U6.2 2845,1790 2845,1735 2815,1705 2360,1705 2205,1860 C13.2
  other v1: 3385,2045.58
NetC1_1: C1.1 D4.1 D5.2 D6.2 D7.1 R12.1 U2.4 U2.5 U2.6 | length 1120.3
  Top Layer w20: D5.2 D6.2 2335,3065 2398.58,3001.42 D4.1 2523.58,3001.42 2553.46,2971.54 R12.1 2713.98,2971.54 U2.4 2715.51,2899.49 2760,2855 2905,2855 2925,2875 D7.1 2925,2915 2904.49,2935.51 U2.5 ; U2.6 U2.5 ; C1.1 3002.6,2970 U2.5
NetC1_2: C1.2 D1.1 R1.2 R3.2 U2.8 | length 543.6
  Top Layer w20: D1.1 2885,3260 2923.46,3221.54 R3.2 2923.46,3138.98 U2.8 3001.54,3120 R1.2 C1.2
NetC3_2: C3.2 R15.2 R16.1 | length 397
  Top Layer w39.37: R15.2 2452.6,3492.6 C3.2 2637.6,3495 R16.1
NetC4_2: C4.2 R19.1 | length 338.6
  Top Layer w39.37: R19.1 1939.72,3389.72 C4.2
NetC5_1: C5.1 U5.4 | length 195.9
  Top Layer w10: C5.1 3585,2285 3616.61,2253.39 U5.4
NetC8_1: C8.1 C9.1 R21.1 U5.5 | length 320.5
  Top Layer w10: C8.1 3531.26,2227.8 U5.5
  Top Layer w20: R21.1 C9.1 C8.1
NetC16_1: C16.1 P7.2 R31.1 R33.2 | length 246.1
  Top Layer w20: P7.2 3356.54,3863.46 C16.1 ; R31.1 3426.54,3865 C16.1 ; R33.2 C16.1
NetC18_1: C18.1 P9.2 R35.1 R36.2 | length 246.1
  Top Layer w20: P9.2 3356.54,3488.46 C18.1 ; R35.1 3431.54,3490 C18.1 ; R36.2 C18.1
NetC20_2: C20.2 R37.1 R39.2 R41.2 | length 519
  Top Layer w20: R37.1 3209.88,2325 C20.2 3211.54,2306.65 R41.2 R39.2
NetD1_2: D1.2 D2.1 D3.1 D4.2 R2.2 | length 906.5
  Top Layer w20: v2(2275,2935) 2276.26,2936.26 D3.1 ; v2(2275,3300) 2275,3226.26 D2.1 2340,3225 2386.42,3178.58 D4.2 2588.35,3178.58 R2.2@2588.74,3178.19 ; D1.2 R2.2@2588.74,3178.19 ; R2.2 R2.2@2588.74,3178.19
  Bottom Layer w20: v2(2275,2935) v2(2275,3300)
NetD2_2: D2.2 D5.1 R6.2 | length 182.9
  Top Layer w20: R6.2 2143.74,3185 D2.2 D5.1
NetD3_2: D3.2 D6.1 R10.2 | length 180.8
  Top Layer w20: R10.2 2148.74,3020 D3.2 D6.1
NetD7_2: D7.2 R3.1 U2.2 | length 437.8
  Top Layer w20: U2.2 2800,3070 ; D7.2 2800,2927.48 2800,3070 ; R3.1 2820,3190 2800,3170 2800,3070
NetD8_3: D8.3 U4.4 | length 851
  Bottom Layer w39.37: D8.3 2395,4250 2655,4250 2790,4115 U4.4
NetD9_1: D9.1 D10.1 K1.2 | length 322.7
  Top Layer w20: D9.1 3470,4399.09 D10.1
  Top Layer w39.37: K1.2 3465.2,4403.9 D9.1
NetD9_2: D9.2 R20.1 | length 155.4
  Top Layer w20: R20.1 3880.91,4245.91 D9.2
NetD10_2: D10.2 K1.1 Q1.3 | length 345.6
  Top Layer w20: K1.1 3275.79,4085 Q1.3 3470,4086.34 D10.2
NetD11_1: D11.1 D13.2 P6.1 | length 468.9
  Top Layer w50: P6.1 1658.58,2211.42 D11.1 D13.2
NetD12_1: D12.1 D14.2 P6.2 | length 848.6
  Top Layer w50: D14.2 1860,2038.58 D12.1 1873.27,2198.15 v2(1996.85,2198.15)
  Bottom Layer w50: P6.2 v2(1996.85,2198.15) v2@2000,2195
NetD15_1: D15.1 R32.2 | length 80.7
  Top Layer w20: R32.2 3870,2825 3880,2835 D15.1
NetD16_1: D16.1 D18.2 P8.2 | length 1891
  Top Layer w20: P8.2 1493.43,2700 2855,2700 2870,2685 2870,2495 2915,2450 D16.1 D18.2
NetD16_2: D16.2 D17.2 R37.2 | length 290
  Top Layer w20: D17.2 D16.2 2781.42,2325.12 R37.2
NetD17_1: D17.1 D19.2 P8.1 | length 1806.5
  Top Layer w20: P8.1 1641.57,2873.43 1765,2750 2880,2750 2958.58,2671.42 D17.1 D19.2
NetQ1_1: Q1.1 R22.2 R25.2 | length 150.3
  Top Layer w20: Q1.1 3696.06,4047.6 R22.2
NetQ2_1: Q2.1 R30.1 | length 75.3
  Top Layer w20: R30.1 3643.94,2812.4 Q2.1
NetQ3_1: Q3.1 R40.1 | length 80
  Top Layer w20: Q3.1 R40.1
NetR1_1: R1.1 U1.1 | length 93.5
  Top Layer w20: R1.1 3041.54,3183.46 3050,3175 U1.1
NetR2_1: R2.1 R12.2 U2.3 | length 204.7
  Top Layer w20: R2.1 R12.2 2621.54,3038.46 2640,3020 U2.3
NetR4_2: R4.2 R5.1 | length 80.2
  Top Layer w20: R4.2 R5.1
NetR5_2: R5.2 R6.1 | length 80.2
  Top Layer w20: R5.2 R6.1
NetR7_2: R7.2 U1.3 | length 75.6
  Top Layer w20: U1.3 3468.46,3075 R7.2
NetR8_2: R8.2 R9.1 | length 82.6
  Top Layer w20: R8.2 R9.1
NetR9_2: R9.2 R10.1 | length 77.8
  Top Layer w20: R9.2 R10.1
NetR13_2: R13.2 U3.1 | length 84
  Top Layer w10: R13.2 U3.1
NetR14_2: R14.2 R15.1 | length 87.8
  Top Layer w39.37: R15.1 R14.2
NetR16_2: R16.2 R17.1 | length 75.2
  Top Layer w39.37: R16.2 R17.1
NetR17_2: R17.2 U4.6 | length 151.1
  Top Layer w39.37: R17.2 2787.4,3717.4 U4.6
NetR18_2: R18.2 U4.1 | length 91.5
  Top Layer w20: R18.2 U4.1
NetR23_1: R23.1 R24.2 | length 648.3
  Top Layer w10: v1(4165,1980) 4285,1980 4319.53,2014.53 4319.53,2413.94 R23.1@4313.46,2420
  Bottom Layer w10: v1(4165,1980) R24.2
NetR26_1: R26.1 R27.2 | length 1228.6
  Top Layer w10: R26.1 4120,2420 4165,2465 4334.61,2465 4349.61,2450 4349.61,1979.61 4315,1945 4145,1945 4115,1975 4115,2015 4145,2045 v1(4165,2045)
  Bottom Layer w10: v1(4165,2045) 4190,2070 R27.2
NetU1_2: U1.2 U2.1 | length 544.7
  Top Layer w20: v2(2715,3190) 2715,3120.51 U2.1
  Bottom Layer w20: v2(2715,3190) 2715,3110 2750,3075 U1.2
RELAY_CTRL: R22.1 U5.12 | length 3749.7
  Top Layer w10: R22.1 3700,4395 3595,4500 3120,4500 3010,4390 3010,3555 3305,3260 3305,2805.15 3790,2320.15 3790,2195 3859.57,2125.43 U5.12
RS_485_A: P2.1 U3.6 | length 290
  Top Layer w20: U3.6 4025,3040 4103.43,2961.57 P2.1
RS_485_B: P2.2 U3.7 | length 285.8
  Top Layer w20: U3.7 4020,3090 4088.43,3158.43 P2.2
STATUS_OUT: R30.2 U5.18 | length 653.7
  Top Layer w10: R30.2 3640,2650 3655,2635 3725,2635 3744.41,2615.59 3744.41,2480.59 3870,2355 3870,2300 3891.02,2278.98 U5.18
STATUS_OUT_: P4.2 Q2.3 R32.1 R34.1 | length 418.8
  Top Layer w20: Q2.3 3849.8,2721.54 R32.1 R34.1 4041.54,2721.54 4085,2765 P4.2
SWCLK: P5.1 R26.2 U5.20 | length 227.7
  Top Layer w10: U5.20 3995,2330.16 ; R26.2 3995,2330.16 ; P5.1 4074.84,2330.16 3995,2330.16
SWDIO: P5.3 R23.2 U5.19 | length 478.8
  Top Layer w10: U5.19 4000.43,2304.57 4035,2270 4215,2270 P5.3 4246.54,2358.46 R23.2@4246.54,2420
TRAFO_TEMP: C17.1 R33.1 U5.10 | length 1998.2
  Top Layer w10: v1(3585,2035) 3615,2035 3679.84,2099.84 U5.10
  Top Layer w20: v1(3495,3675) 3493.46,3676.54 C17.1 3500,3736.54 R33.1
  Bottom Layer w10: v1(3495,3675) 3445,3625 3445,2615 3505,2555 3505,2115 v1(3585,2035)
TRAFO_VOLT: C21.1 R39.1 U5.11 | length 822.2
  Top Layer w10: v1(3585,1990) 3810,1990 3919.84,2099.84 U5.11
  Top Layer w20: v1(3305,2130) 3305,2166.54 C21.1
  Bottom Layer w10: v1(3305,2130) 3415,2130 3555,1990 v1(3585,1990)
TRIAC_CTRL: R18.1 U5.13 | length 1792.6
  Top Layer w10: R18.1 3090,3505 3325,3270 3325,2813.43 3810,2328.43 3810,2225 3883.98,2151.02 U5.13
TRIAC_TEMP: C19.1 R36.1 U5.6 | length 1362
  Top Layer w10: C19.1@3500,3361.54 3535,3326.54 v1(3535,3195) ; v1@3630,2200 3632.2,2202.2 U5.6
  Top Layer w20: C19.1@3500,3361.54 R36.1
  Bottom Layer w10: v1(3535,3195) 3535,2640 3590,2585 3590,2230 v1(3625,2195)
USART1_DE: U3.2 U3.3 U5.7 | length 1651.4
  Top Layer w10: v1@3630,2155 3651.61,2176.61 U5.7 ; v1(3670,3065) 3707.48,3065 U3.2 U3.3
  Bottom Layer w10: v1(3625,2155) 3622.57,2155 3570,2207.57 3570,2576.72 3505,2641.72 3505,3225 3515,3235 3630,3235 3670,3195 v1(3670,3065)
USART1_RX: R13.1 U5.9 | length 1637.7
  Top Layer w10: v1(3500,3290) 3500,3165 3525,3140 R13.1 ; v1(3585,2080) 3630,2080 3675.43,2125.43 U5.9
  Bottom Layer w10: v1(3500,3290) 3465,3255 3465,2625.15 3530,2560.15 3530,2135 v1(3585,2080)
USART1_TX: U3.4 U5.8 | length 1863.2
  Top Layer w10: v1(3605,2120) 3640,2120 3671.02,2151.02 U5.8 ; v1(3730,2950) 3732.48,2952.48 U3.4
  Bottom Layer w10: v1(3605,2120) 3550,2175 3550,2568.43 3485,2633.43 3485,3233.28 3506.72,3255 3695,3255 3730,3220 v1(3730,2950)
ZEROCROSS: R7.1 R11.2 U5.14 | length 1049.1
  Top Layer w10: R11.2 3470,2696.72 3830,2336.72 3830,2240 3893.39,2176.61 U5.14
  Top Layer w20: R11.2 R7.1
pads on no net: U2.7 U4.3 U4.5

## Polygon pours and split planes (outlines as drawn)
GND on Top Layer "Bottom Layer-No Net" (hatched 45Degree grid 20 track 8, remove dead copper, pour order 0): 2970,4592.76 2970,3545 3255,3260 3255,2435 3010,2190 2215,2190 2115,2090 2115,1640 4375,1640 4365,1650 4365,4592.76
GND on Bottom Layer "Bottom Layer-No Net" (hatched 45Degree grid 20 track 8, remove dead copper, pour order 6): 2965,4592.76 2965,3545 3245,3265 3245,2400 3235,2400 3025,2190 2215,2190 2110,2085 2110,1640 4365,1640 4365,4592.76

## Keep-outs
Keep-Out Layer:
  the board outline again, w10

## Other copper
Top Layer:
  rectangle net +3V3: 3080,1685 3445,1925
Bottom Layer:
  rectangle net +3V3: 3080,1685 3445,1925

## Text inside footprints (layer, text, board x,y; h text height)
C12: Top Overlay "+" at 2613.98,2459.53 h40 r180
C13: Top Overlay "+" at 2558.35,1964.53 h40 r180